# Altium PCB MB1710051255.PcbDoc (part 1 of 4)
Units mm, origin at the board's own origin, x right, y up, seen from the top; angles counter-clockwise.
Board outline 209.55 x 153.67 mm, 2 copper layers (Top Layer, Bottom Layer); 288 components, 212 nets, 1030 pads, 414 vias.
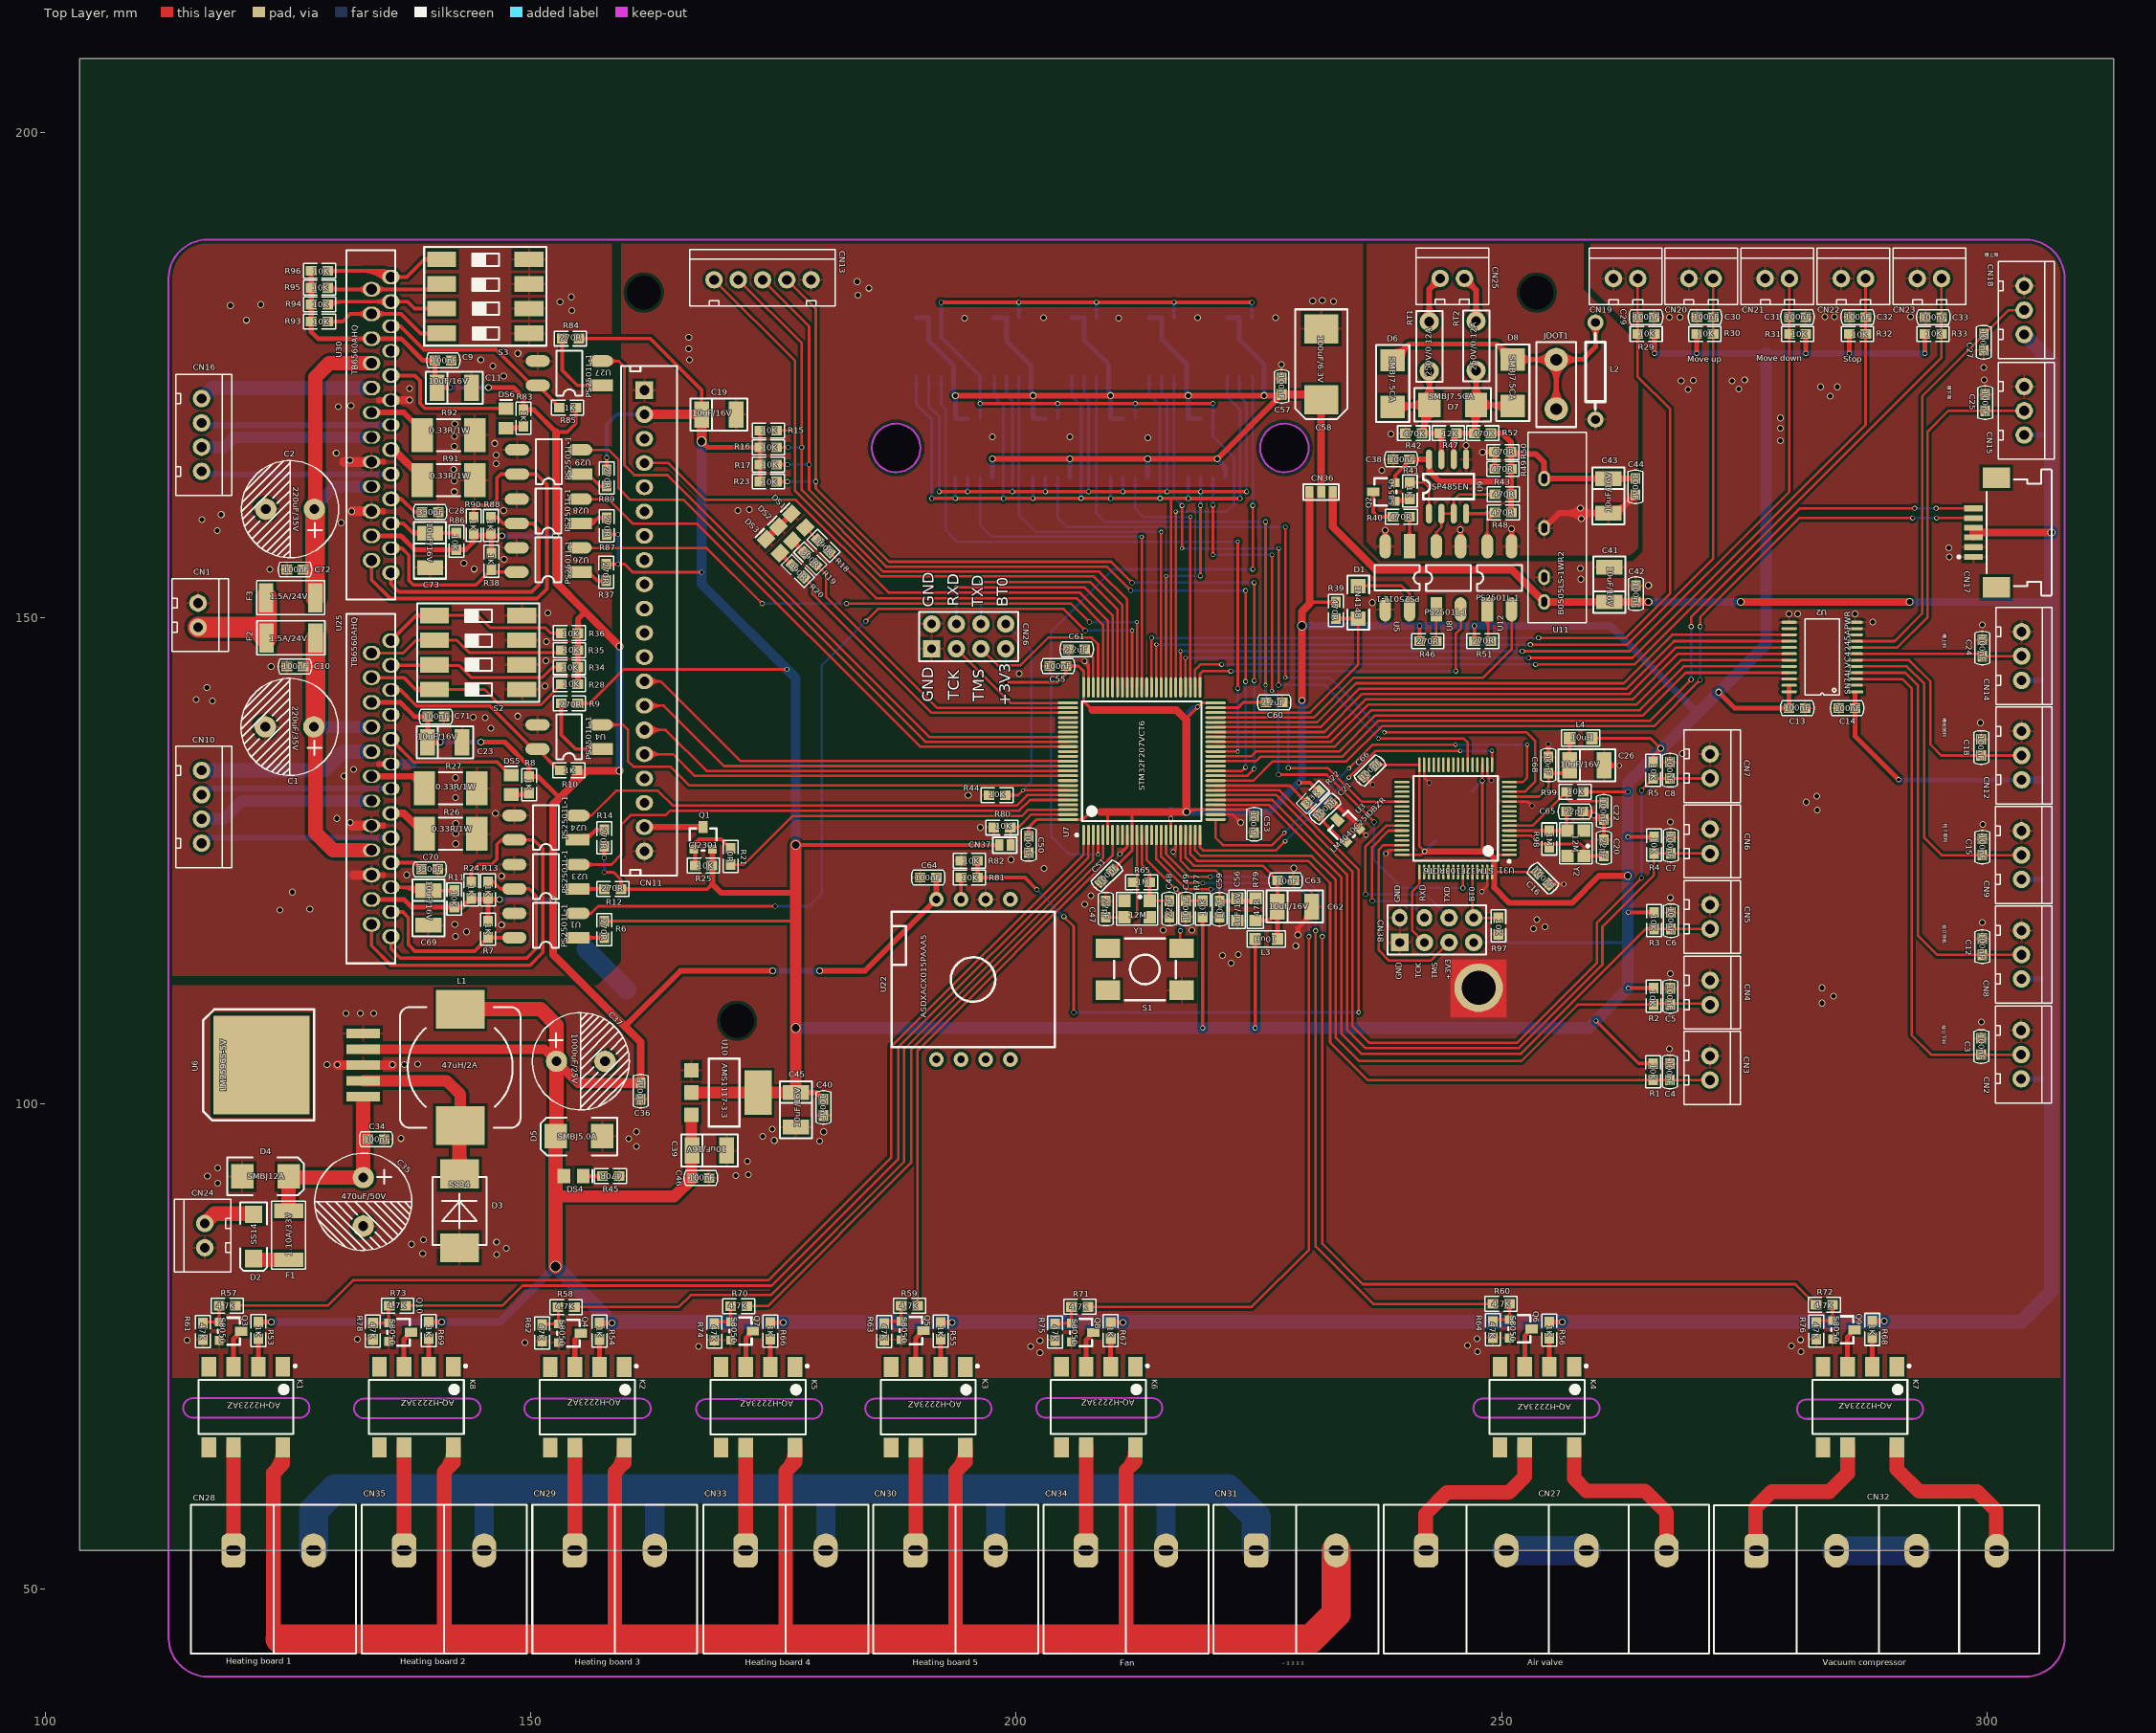
[diagram p0: Top Layer view]
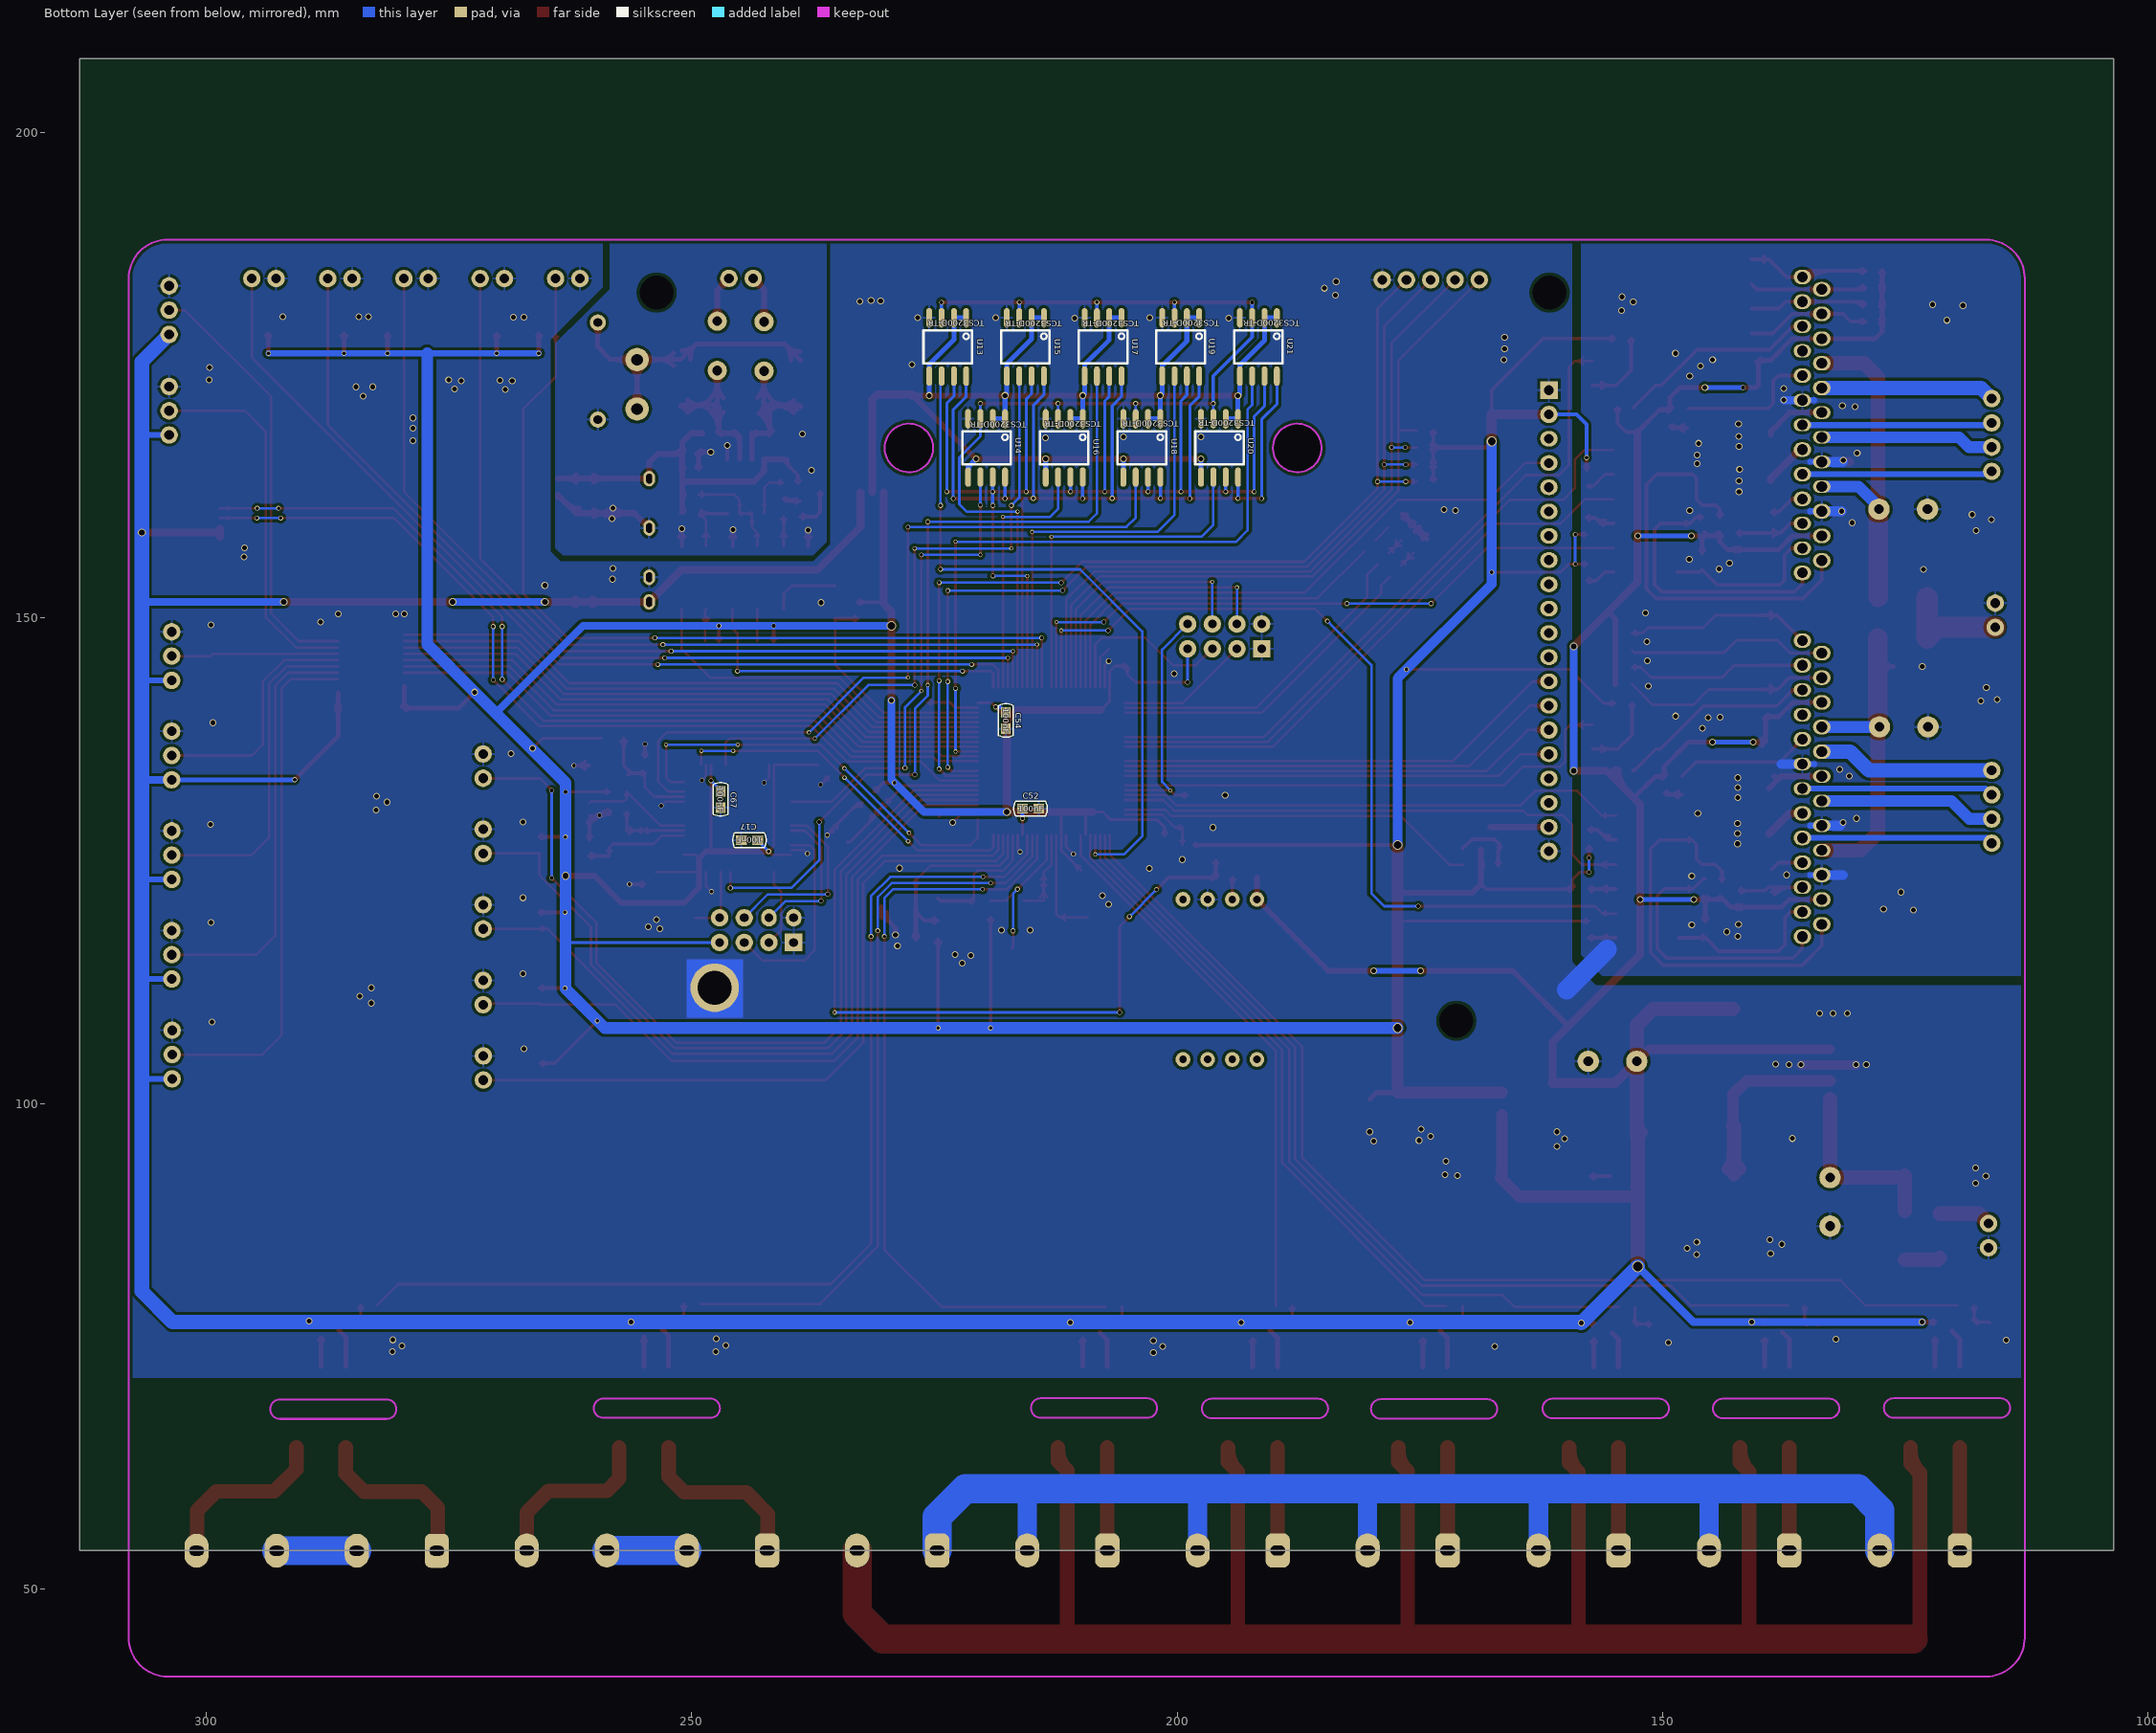
[diagram p1: Bottom Layer view, seen from below]

## Layer stack, top to bottom
Top Solder: solder mask 0.0102, Solder Resist, Dk 3.5
Top Layer: signal copper 0.0356
Dielectric1: dielectric 0.32, FR-4, Dk 4.8
Bottom Layer: signal copper 0.0356
Bottom Solder: solder mask 0.0102, Solder Resist, Dk 3.5

## Board outline
103.505,207.645 313.055,207.645 313.055,206.629 313.055,54.229 313.055,53.975 103.505,53.975 103.505,207.645

## Design rules (kind name [scope] priority, off if disabled: settings)
Clearance [All] p1: gap=0.3 ignorepadtopadclearanceinfootprint=FALSE except(0: Arc-Hole Track-Hole SMDPad-Hole THPad-Hole Via-Hole Fill-Hole Poly-Hole Region-Hole Text-Hole)
PolygonConnect [isvia] p1: connectstyle=Direct reliefconductorwidth=0.254 reliefentries=4 polygonreliefangle="90 Angle" airgapwidth=0.254
PolygonConnect PolygonConnect_1 [haspad ('c1-2')] p2: connectstyle=Relief reliefconductorwidth=0.3 reliefentries=4 polygonreliefangle="90 Angle" airgapwidth=0.254
PolygonConnect PolygonConnect_2 [All] p3: connectstyle=Relief reliefconductorwidth=0.254 reliefentries=4 polygonreliefangle="90 Angle" airgapwidth=0.254
RoomDefinition U_Step [InComponentClass('U_Step')] p1: confinementstyle=ConfineIn formatcopy=TRUE lockcomponents=FALSE outline 0,0 50.8,0 50.8,25.4 0,25.4
RoomDefinition U_Main [InComponentClass('U_Main')] p2: confinementstyle=ConfineIn formatcopy=TRUE lockcomponents=FALSE outline 0,0 50.8,0 50.8,25.4 0,25.4
RoutingVias [All] p1: holewidth=0.711 width=1.27 viastyle="Through Hole" minholewidth=0.711 minwidth=1.27 maxholewidth=0.711 maxwidth=1.27
SilkToSolderMaskClearance SilkscreenOverComponentPads [IsPad] p1: minsilkscreentomaskgap=0.254 clearancetoexposedcopper=TRUE
SolderMaskExpansion [All] p1: expansion=0.102
Width [All] p1: maxlimit=3 minlimit=0.254 preferedwidth=0.254 minimp=50.000000 maximp=50.000000 favimp=50.000000
29 further rules are at their usual default settings.

## Classes and differential pairs
component class U_Step: C1 C2 C9 C10 C11 C23 C28 C69 C70 C71 C72 C73 CN1 CN10 CN16 DS5 DS6 F2 F3 R6 R7 R8 R9 R10 R11 R12 R13 R14 R24 R26 R27 R28 R34 R35 R36 R37 R38 R83 R84 R85 R86 R87 R88 R89 R90 R91 R92 R93 R94 R95 R96 S2 S3 U1 U4 U23 U24 U25 U26 U27 U28 U29 U30
component class U_Main: C3 C4 C5 C6 C7 C8 C12 C13 C14 C15 C16 C17 C18 C19 C20 C21 C22 C24 C25 C26 C27 C29 C30 C31 C32 C33 C34 C35 C36 C37 C38 C39 C40 C41 C42 C43 C44 C45 C46 C47 C48 C49 C50 C51 C52 C53 C54 C55 C56 C57 C58 C59 C60 C61 C62 C63 C64 C65 C66 C67 C68 CN2 CN3 CN4 CN5 CN6 CN7 CN8 CN9 CN11 CN12 CN13 CN14 CN15 CN17 CN18 CN19 CN20 CN21 CN22 CN23 CN24 CN25 CN26 CN27 CN28 CN29 CN30 CN31 CN32 CN33 CN34 CN35 CN36 CN37 CN38 D1 D2 D3 D4 D5 D6 D7 D8 DS1 DS2 DS3 DS4 F1 JDOT1 K1 K2 K3 K4 K5 K6 K7 K8 L1 L2 L3 L4 Q1 Q2 Q3 Q4 Q5 Q6 Q7 Q8 Q9 Q10 R1 R2 R3 R4 R5 R15 R16 R17 R18 R19 R20 R21 R22 R23 R25 R29 R30 R31 R32 R33 R39 R40 R41 R42 R43 R44 R45 R46 R47 R48 R49 R50 R51 R52 R53 R54 R55 R56 R57 R58 R59 R60 R61 R62 R63 R64 R65 R66 R67 R68 R69 R70 R71 R72 R73 R74 R75 R76 R77 R78 R79 R80 R81 R82 R97 R98 R99 RT1 RT2 S1 U2 U3 U5 U6 U7 U8 U9 U10 U11 U12 U13 U14 U15 U16 U17 U18 U19 U20 U21 U22 U31 Y1 Y2

## Components (designator, comment, footprint, x,y, rotation, side; value= is the part's Value field where it differs from the comment)
C1 "220uF/35V" CAP-D10/L13 125.146,138.786 r180 top
C2 "220uF/35V" CAP-D10/L13 125.197,161.214 r180 top
C3 "100nF" C0603-3 299.39,105.867 r270 top
C4 "100nF" C0603-3 267.31,103.251 r90 top
C5 "100nF" C0603-3 267.36,111.023 r90 top
C6 "100nF" C0603-3 267.437,118.821 r90 top
C7 "100nF" C0603-3 267.411,126.594 r90 top
C8 "100nF" C0603-3 267.335,134.315 r90 top
C9 "100nF" C0603-3 140.97,176.53 r0 top
C10 "100nF" C0603-3 125.705,145.009 r180 top
C11 "10uF/16V" CE1210 142.164,173.812 r0 top
C12 "100nF" C0603-3 299.517,116.154 r270 top
C13 "100nF" C0603-3 280.441,140.716 r0 top
C14 "100nF" C0603-3 285.572,140.716 r0 top
C15 "100nF" C0603-3 299.517,126.416 r270 top
C16 "100nF" C0603-3 254.254,123.19 r135 top
C17 "100nF" C0603-3 244.043,127.127 r180 bottom
C18 "100nF" C0603-3 299.39,136.677 r270 top
C19 "10uF/16V" CE1210 169.418,171.044 r0 top
C20 "22pF" C0603-3 260.528,126.34 r90 top
C21 "100nF" C0603-3 231.789,130.352 r45 top
C22 "100nF" C0603-3 260.528,130.099 r270 top
C23 "10uF/16V" CE1210 141.199,137.287 r0 top
C24 "100nF" C0603-3 299.517,146.914 r270 top
C25 "100nF" C0603-3 299.796,172.187 r270 top
C26 "10uF/16V" CE1210 258.826,134.899 r0 top
C27 "100nF" C0603-3 299.644,178.41 r90 top
C28 "330pF" C0603-3 139.624,160.909 r0 top
C29 "100nF" C0603-3 264.871,181 r180 top
C30 "100nF" C0603-3 270.942,181 r0 top
C31 "100nF" C0603-3 280.467,181 r180 top
C32 "100nF" C0603-3 286.664,181 r0 top
C33 "100nF" C0603-3 294.462,181 r0 top
C34 "100nF" C0603-3 134.061,96.317 r180 top
C35 "470uF/50V" CAP-D10/L20 132.74,89.865 r270 top
C36 "100nF" C0603-3 161.315,101.27 r90 top
C37 "1000uF/25V" CAP-D10/L20 155.143,104.343 r0 top
C38 "100nF" C0603-3 239.649,166.345 r180 top
C39 "10uF/16V" CE1210 168.453,95.225 r0 top
C40 "100nF" C0603-3 180.137,99.593 r90 top
C41 "10uF/16V" CE1210 261.01,153.492 r90 top
C42 "100nF" C0603-3 263.83,152.502 r90 top
C43 "10uF/16V" CE1210 261.061,162.535 r270 top
C44 "100nF" C0603-3 263.779,163.525 r270 top
C45 "10uF/16V" CE1210 177.368,99.289 r270 top
C46 "100nF" C0603-3 167.513,92.329 r180 top
C47 "22pF" C0603-3 209.22,120.015 r90 top
C48 "22pF" C0603-3 215.773,120.04 r270 top
C49 "100nF" C0603-3 217.475,120.04 r270 top
C50 "100nF" C0603-3 201.27,126.67 r90 top
C51 "100nF" C0603-3 209.321,123.444 r45 top
C52 "100nF" C0603-3 215.087,130.378 r0 bottom
C53 "100nF" C0603-3 224.511,128.753 r90 top
C54 "100nF" C0603-3 217.627,139.446 r90 bottom
C55 "100nF" C0603-3 204.292,145.059 r0 top
C56 "1uF/16V" C0805-2-O 222.758,120.015 r270 top
C57 "100nF" C0603-3 227.33,173.863 r270 top
C58 "100uF/6.3V" CASE-D_7343 231.419,176.149 r270 top
C59 "10nF" C0603-3 220.929,120.015 r270 top
C60 "2.2uF" C0603-3 226.568,141.326 r180 top
C61 "2.2uF" C0603-3 206.223,146.787 r0 top
C62 "10uF/16V" CE1210 228.727,120.345 r0 top
C63 "10nF" C0603-3 227.736,122.961 r0 top
C64 "100nF" C0603-3 190.932,123.266 r180 top
C65 "22pF" C0603-3 257.531,130.073 r0 top
C66 "100nF" C0603-3 236.423,134.29 r45 top
C67 "100nF" C0603-3 247.015,131.318 r90 bottom
C68 "10nF" C0603-3 254.813,134.849 r90 top
C69 "10uF/16V" CE1210 139.522,120.091 r270 top
C70 "330pF" C0603-3 139.573,124.13 r0 top
C71 "100nF" C0603-3 140.208,139.852 r0 top
C72 "100nF" C0603-3 125.705,154.991 r180 top
C73 "10uF/16V" CE1210 139.7,156.921 r270 top
CN1 "" XHS2-2.5 115.722,150.292 r270 top
CN2 "检-下料" XHS3-2.5 300.838,110.033 r270 top
CN3 "" XHS2-2.5 271.45,103.657 r270 top
CN4 "" XHS2-2.5 271.475,111.43 r270 top
CN5 "" XHS2-2.5 271.475,119.228 r270 top
CN6 "" XHS2-2.5 271.475,127 r270 top
CN7 "" XHS2-2.5 271.475,134.747 r270 top
CN8 "检-待机" XHS3-2.5 300.863,120.32 r270 top
CN9 "检-取料" XHS3-2.5 300.863,130.581 r270 top
CN10 "" XHS4-2.5 113.411,136.804 r270 top
CN11 "" XH20-2.5 159.309,175.971 r270 top
CN12 "槽检测料" XHS3-2.5 300.888,140.843 r270 top
CN13 "" XHS5-2.5 166.37,182.169 r0 top
CN14 "槽上料" XHS3-2.5 300.888,151.079 r270 top
CN15 "槽下限" XHS3-2.5 301.142,176.352 r270 top
CN16 "" XHS4-2.5 113.411,175.108 r270 top
CN17 "" FFC/SM1.0-2H6 299.771,158.801 r90 top
CN18 "槽上限" XHS3-2.5 301.142,186.715 r270 top
CN19 "" XHS2-2.5 262.763,184.963 r0 top
CN20 "Move up" XHS2-2.5 270.535,184.963 r0 top
CN21 "Move down" XHS2-2.5 278.384,184.963 r0 top
CN22 "Stop" XHS2-2.5 286.233,184.963 r0 top
CN23 "" XHS2-2.5 294.056,184.963 r0 top
CN24 "" XHS2-2.5 116.408,86.385 r90 top
CN25 "" XHS2-2.5 244.907,184.988 r0 top
CN26 "" HDR2X4_CEN#1 195.148,148.184 r0 top
CN27 "Air valve" SIP4-8.25 246.355,53.953 r0 top
CN28 "Heating board 1" SIP2-8.25 123.495,53.953 r0 top
CN29 "Heating board 3" SIP2-8.25 158.648,53.953 r0 top
CN30 "Heating board 5" SIP2-8.25 193.751,53.953 r0 top
CN31 "～220V" SIP2-8.25 228.829,53.953 r0 top
CN32 "Vacuum compressor" SIP4-8.25 280.365,53.927 r0 top
CN33 "Heating board 4" SIP2-8.25 176.251,53.953 r0 top
CN34 "Fan" SIP2-8.25 211.303,53.953 r0 top
CN35 "Heating board 2" SIP2-8.25 141.072,53.953 r0 top
CN36 "" SMD3-1.2 230.2,162.966 r0 top
CN37 "" SMD2-1.2 198.831,126.619 r0 top
CN38 "" HDR2X4_CEN#2 243.357,117.932 r0 top
D1 "1N4148" Mini-MELF-O 235.204,151.663 r90 top
D2 "SS14" SMA 121.437,86.284 r270 top
D3 "SS34" SMC 142.646,88.976 r90 top
D4 "SMBJ12A" SMB 122.53,92.532 r0 top
D5 "SMBJ5.0A" SMB 155.092,96.571 r180 top
D6 "SMBJ7.5CA" SMB-2 238.709,174.015 r90 top
D7 "SMBJ7.5CA" SMB-2 245.11,171.907 r180 top
D8 "SMBJ7.5CA" SMB-2 251.079,174.092 r90 top
DS1 "" LED-0805 177.554,160.033 r135 top
DS2 "" LED-0805 176.206,158.686 r135 top
DS3 "" LED-0805 174.931,157.41 r135 top
DS4 "" LED-0805 154.407,92.507 r0 top
DS5 "" LED-0805 147.98,132.817 r90 top
DS6 "" LED-0805 147.447,170.561 r90 top
F1 "1.10A/33V" 1812 125.07,86.538 r90 top
F2 "1.5A/24V" 1812 125.171,147.98 r180 top
F3 "1.5A/24V" 1812 125.146,152.121 r180 top
JDOT1 "" PIN2-W4/L8.8 255.575,174.142 r90 top
K1 "AQ-H2223AZ" "SOP8 -2.54" 120.65,68.736 r180 top
K2 "AQ-H2223AZ" "SOP8 -2.54" 155.804,68.711 r180 top
K3 "AQ-H2223AZ" "SOP8 -2.54" 190.932,68.711 r180 top
K4 "AQ-H2223AZ" "SOP8 -2.54" 253.644,68.736 r180 top
K5 "AQ-H2223AZ" "SOP8 -2.54" 173.406,68.711 r180 top
K6 "AQ-H2223AZ" "SOP8 -2.54" 208.458,68.736 r180 top
K7 "AQ-H2223AZ" "SOP8 -2.54" 286.893,68.736 r180 top
K8 "AQ-H2223AZ" "SOP8 -2.54" 138.201,68.736 r180 top
L1 "47uH/2A" L-SMD-12 142.519,103.683 r90 top
L2 "" RH-10.0 259.664,175.362 r90 top
L3 "10uH" L0805 225.755,116.942 r0 top
L4 "10uH" L0805 258.14,137.617 r180 top
Q1 "CJ2301" SOT-23 167.767,127.229 r0 top
Q2 "S8550" SOT-23 237.998,163.017 r90 top
Q3 "S8050" SOT-23 118.923,76.508 r270 top
Q4 "S8050" SOT-23 153.899,76.305 r270 top
Q5 "S8050" SOT-23 189.179,76.584 r270 top
Q6 "S8050" SOT-23 251.841,76.762 r270 top
Q7 "S8050" SOT-23 171.628,76.533 r270 top
Q8 "S8050" SOT-23 206.705,76.381 r270 top
Q9 "S8050" SOT-23 285.115,76.66 r270 top
Q10 "S8050" SOT-23 136.398,76.406 r270 top
R1 "10K" R0603-3 265.582,103.302 r90 top
R2 "10K" R0603-3 265.633,111.074 r90 top
R3 "10K" R0603-3 265.684,118.872 r90 top
R4 "10K" R0603-3 265.684,126.644 r90 top
R5 "10K" R0603-3 265.608,134.366 r90 top
R6 "270R" R0603-3 157.556,117.958 r90 top
R7 "1K" R0603-3 145.593,117.907 r270 top
R8 "1K" R0603-3 149.809,132.867 r90 top
R9 "270R" R0603-3 154.026,141.199 r0 top
R10 "1K" R0603-3 153.949,134.315 r0 top
R11 "10K" R0603-3 142.113,121.031 r270 top
R12 "270R" R0603-3 158.471,122.072 r0 top
R13 "1K" R0603-3 145.593,122.022 r90 top
R14 "270R" R0603-3 157.556,127.305 r270 top
R15 "10K" R0603-3 174.422,169.316 r180 top
R16 "10K" R0603-3 174.422,167.564 r180 top
R17 "10K" R0603-3 174.422,165.811 r180 top
R18 "390R" R0603-3 180.176,157.41 r315 top
R19 "390R" R0603-3 178.793,156.099 r315 top
R20 "390R" R0603-3 177.536,154.806 r315 top
R21 "0R" R0603-3 170.561,125.4 r270 top
R22 "3.3K" R0603-3 230.519,131.52 r225 top
R23 "10K" R0603-3 174.422,164.059 r180 top
R24 "1K" R0603-3 143.866,121.945 r270 top
R25 "10K" R0603-3 167.818,124.511 r0 top
R26 "0.33R/1W" 2512 141.732,127.762 r180 top
R27 "0.33R/1W" 2512 141.732,132.461 r180 top
R28 "10K" R0603-3 153.949,143.18 r180 top
R29 "10K" R0603-3 264.922,179.248 r0 top
R30 "10K" R0603-3 270.891,179.248 r180 top
R31 "10K" R0603-3 280.518,179.248 r0 top
R32 "10K" R0603-3 286.614,179.248 r180 top
R33 "10K" R0603-3 294.411,179.273 r180 top
R34 "10K" R0603-3 153.949,144.932 r180 top
R35 "10K" R0603-3 153.949,146.685 r180 top
R36 "10K" R0603-3 153.949,148.438 r180 top
R37 "270R" R0603-3 157.764,154.741 r90 top
R38 "1K" R0603-3 145.923,155.804 r270 top
R39 "470R" R0603-3 232.918,150.825 r90 top
R40 "470R" R0603-3 239.7,160.452 r0 top
R41 "1K" R0603-3 240.538,163.068 r270 top
R42 "470K" R0603-3 240.97,169.037 r0 top
R43 "470R" R0603-3 250.114,162.738 r180 top
R44 "10K" R0603-3 198.069,131.75 r0 top
R45 "470R" R0603-3 158.191,92.507 r180 top
R46 "270R" R0603-3 242.367,147.625 r180 top
R47 "12K" R0603-3 244.526,169.037 r0 top
R48 "470R" R0603-3 250.114,160.884 r180 top
R49 "470R" R0603-3 250.088,165.354 r180 top
R50 "470R" R0603-3 250.063,167.107 r180 top
R51 "270R" R0603-3 248.006,147.625 r180 top
R52 "470K" R0603-3 248.082,169.037 r0 top
R53 "1K" R0603-3 121.92,76.584 r270 top
R54 "1K" R0603-3 157.074,76.508 r270 top
R55 "1K" R0603-3 192.202,76.533 r270 top
R56 "1K" R0603-3 254.914,76.61 r270 top
R57 "4.7K" R0603-3 118.694,79.175 r180 top
R58 "4.7K" R0603-3 153.594,79.023 r180 top
R59 "4.7K" R0603-3 188.951,79.15 r180 top
R60 "4.7K" R0603-3 249.987,79.353 r0 top
R61 "47K" R0603-3 116.23,76.483 r270 top
R62 "47K" R0603-3 151.155,76.33 r270 top
R63 "47K" R0603-3 186.411,76.457 r270 top
R64 "47K" R0603-3 249.098,76.66 r270 top
R65 "1M" R0603-3 212.852,122.784 r180 top
R66 "1K" R0603-3 174.676,76.533 r270 top
R67 "1K" R0603-3 209.728,76.559 r270 top
R68 "1K" R0603-3 288.163,76.686 r270 top
R69 "1K" R0603-3 139.471,76.584 r270 top
R70 "4.7K" R0603-3 171.374,79.124 r180 top
R71 "4.7K" R0603-3 206.502,79.048 r180 top
R72 "4.7K" R0603-3 283.261,79.251 r0 top
R73 "4.7K" R0603-3 136.22,79.175 r180 top
R74 "47K" R0603-3 168.885,76.432 r270 top
R75 "47K" R0603-3 203.987,76.406 r270 top
R76 "47K" R0603-3 282.397,76.533 r270 top
R77 "10K" R0603-3 219.202,120.066 r90 top
R78 "47K" R0603-3 133.731,76.508 r270 top
R79 "47R" R0805-3-O 224.638,119.99 r270 top
R80 "10K" R0603-3 198.577,128.422 r0 top
R81 "10K" R0603-3 195.123,123.266 r180 top
R82 "10K" R0603-3 195.199,124.993 r0 top
R83 "1K" R0603-3 149.225,170.637 r90 top
R84 "270R" R0603-3 154.127,178.791 r0 top
R85 "1K" R0603-3 153.822,171.679 r0 top
R86 "10K" R0603-3 142.316,157.861 r270 top
R87 "270R" R0603-3 157.81,159.436 r270 top
R88 "1K" R0603-3 145.872,159.563 r90 top
R89 "270R" R0603-3 157.81,164.465 r90 top
R90 "1K" R0603-3 144.094,159.487 r270 top
R91 "0.33R/1W" 2512 141.529,164.186 r180 top
R92 "0.33R/1W" 2512 141.529,168.859 r180 top
R93 "10K" R0603-3 128.27,180.543 r0 top
R94 "10K" R0603-3 128.27,182.296 r0 top
R95 "10K" R0603-3 128.27,184.023 r0 top
R96 "10K" R0603-3 128.27,185.75 r0 top
R97 "10K" R0603-3 249.657,118.313 r90 top
R98 "1M" R0603-3 254.889,127.279 r90 top
R99 "10K" R0603-3 257.505,132.105 r180 top
RT1 "250V/0.12A" FUSE-W2.8/L7.2 242.672,178.029 r90 top
RT2 "250V/0.12A" FUSE-W2.8/L7.2 247.498,178.079 r90 top
S1 "" SW_1102S 213.233,113.817 r180 top
S2 "" SDSW8-H 149.073,142.646 r90 top
S3 "" SDSW8-H 149.809,179.324 r90 top
U1 "PS2501L-1" SOP4-2.54 151.536,118.161 r180 top
U2 "SN74LVC4245APWR" TSSOP24-PW 286.41,142.418 r180 top
U3 "LM4040C25IDBZR" SOT-23 233.973,128.37 r45 top
U4 "PS2501L-1" SOP4-2.54 153.924,137.592 r180 top
U5 "PS2501L-1" SOP4-2.54 239.42,154.127 r270 top
U6 "LM2596S-5V" TO-263-5 122.403,104.115 r90 top
U7 "STM32F207VCT6" LQFP100_M 212.928,135.255 r90 top
U8 "PS2501L-1" SOP4-2.54 244.348,154.153 r90 top
U9 "SP485EN" SOP8 244.323,163.652 r90 top
U10 "AMS1117-3.3" SOT-223 169.85,101.117 r270 top
U11 "B0505LS-1WR2" B-LS 258.724,149.53 r90 top
U12 "PS2501L-1" SOP4-2.54 249.606,154.153 r90 top
U13 "TCS3200D-TR" SOIC8 223.621,177.923 r270 bottom
U14 "TCS3200D-TR" SOIC8 219.621,167.523 r270 bottom
U15 "TCS3200D-TR" SOIC8 215.621,177.923 r270 bottom
U16 "TCS3200D-TR" SOIC8 211.621,167.523 r270 bottom
U17 "TCS3200D-TR" SOIC8 207.621,177.923 r270 bottom
U18 "TCS3200D-TR" SOIC8 203.626,167.523 r270 bottom
U19 "TCS3200D-TR" SOIC8 199.626,177.923 r270 bottom
U20 "TCS3200D-TR" SOIC8 195.626,167.523 r270 bottom
U21 "TCS3200D-TR" SOIC8 191.626,177.923 r270 bottom
U22 "ASDXACX015PAAA5" "Legacy A2" 195.58,112.776 r90 top
U23 "PS2501L-1" SOP4-2.54 151.536,123.19 r180 top
U24 "PS2501L-1" SOP4-2.54 151.536,128.245 r180 top
U25 "TB6560AHQ" HZIP25-P-1.27 136.017,114.427 r90 top
U26 "PS2501L-1" SOP4-2.54 151.765,155.829 r180 top
U27 "PS2501L-1" SOP4-2.54 153.949,175.057 r180 top
U28 "PS2501L-1" SOP4-2.54 151.79,160.833 r180 top
U29 "PS2501L-1" SOP4-2.54 151.816,165.913 r180 top
U30 "TB6560AHQ" HZIP25-P-1.27 136.017,151.892 r90 top
U31 "STM32F103RCT6" LQFP64_L 245.262,129.388 r180 top
Y1 "12M" OSC3225 213.741,120.879 r180 top
Y2 "12M" OSC3225 258.47,125.501 r90 top

## Footprints (in the part's own frame and the unit in brackets; to place one, negate y for a bottom-side part, rotate by r counter-clockwise, add the part's x,y. Pads: shape width x height; smd on the part's side, far side on the other; paste and mask are expansions set on the pad)
1812 [mm]
  rect 1.5x3 smd: 1(-2.642,0.025) 2(2.413,0.025)
  silkscreen extent -3.61,-1.72 3.39,1.78
2512 [mm] "Chip Resistor, Body 6.4x3.2mm, IPC Low Density"
  rect 2.2x3.5 smd: 1(-2.7,0) 2(2.7,0)
  silkscreen extent -1.2,-1.65 1.2,1.65, body extent -3.3,-1.7 3.3,1.7, height 1.2
B-LS [mm]
  oval 1.6x1.2 hole 0.6 slot 1 at 0 deg: 1(2.13,4.35) 2(4.67,4.35) 4(9.75,4.35) 6(14.83,4.35)
  silkscreen extent 0,0 19.6,6
C0603-3 [mm]
  rect 1.1x1 smd: 1(-0.838,0) 2(0.838,0)
  silkscreen extent -1.71,-0.76 1.72,0.76
C0805-2-O [mil]
  rect 47x50 smd: 1(-44,0) 2(46,0)
  silkscreen extent -77,-33 79,33
CAP-D10/L13 [mm]
  round 2.2 hole 1: 1(-2.5,0) 2(2.5,0)
  silkscreen extent -5,-5 5,5
CAP-D10/L20 [mm]
  round 2.2 hole 1: 1(-2.5,0) 2(2.5,0)
  silkscreen extent -5,-5 5,5
CASE-D_7343 [mm]
  rect 3x3.5 smd: 1(3.65,0) 2(-3.65,0)
  silkscreen extent -5.65,-2.7 5.65,2.7
CE1210 [mil]
  rect 60x106.3 smd: 1(-72,-3) 2(68,-3)
  silkscreen extent -117,-68 113,62, body extent -67,-53 63,47, height 39
FFC/SM1.0-2H6 [mm] "FPC Connector, 6-Leads, Right Angle, Pitch 1.0 mm, Mated Height 3.0 mm, SMT"
  rect 0.6x1.9 smd: 1(-2.5,1.175) 2(-1.5,1.175) 3(-0.5,1.175) 4(0.5,1.175) 5(1.5,1.175) 6(2.5,1.175)
  rect 2.1x2.8 smd: MP1(-5.65,-1.175) MP2(5.65,-1.175)
  silkscreen extent -6.5,-6.87 6.5,2.8, body extent -6.5,-6.87 6.5,1.83, height 3.01
FUSE-W2.8/L7.2 [mil]
  round 78 hole 39.37: 1(-101.76,5.33) 2(98.25,5.33)
  silkscreen extent -145,-50 141,57
HDR2X4_CEN#1 [mm]
  rect 1.8x1.8 hole 0.9: 1(-3.861,-1.346)
  round 1.8 hole 0.9: 2(-1.321,-1.346) 3(1.219,-1.346) 4(3.759,-1.346) 5(-3.861,1.194) 6(-1.321,1.194) 7(1.219,1.194) 8(3.759,1.194)
  silkscreen extent -5.13,-2.62 5.03,2.46
HDR2X4_CEN#2 [mm]
  rect 1.8x1.8 hole 0.9: 1(-3.861,-1.346)
  round 1.8 hole 0.9: 2(-1.321,-1.346) 3(1.219,-1.346) 4(3.759,-1.346) 7(1.219,1.194) 8(3.759,1.194)
  oval 1.6x1.8 hole 0.9: 5(-3.861,1.194) 6(-1.321,1.194)
  silkscreen extent -5.13,-2.62 5.03,2.46
HZIP25-P-1.27 [mm]
  oval 1.5x1.8 hole 1.1: 1(2.76,0.425) 2(4.03,2.425) 4(6.57,2.425) 6(9.11,2.425) 7(10.38,0.425) 9(12.92,0.425) 11(15.46,0.425) 16(21.81,2.425) 17(23.08,0.425) 18(24.35,2.425) 20(26.89,2.425) 22(29.43,2.425) 23(30.7,0.425) 24(31.97,2.425) 25(33.24,0.425)
  oval 1.38x1.8 hole 1.1: 3(5.3,0.425) 5(7.84,0.425) 19(25.62,0.425) 21(28.16,0.425)
  oval 1.3x1.8 hole 1.1: 8(11.65,2.425) 10(14.19,2.425) 12(16.73,2.425) 13(18,0.425) 14(19.27,2.425) 15(20.54,0.425)
  silkscreen extent 0,0 36,5
L0805 [mil]
  rect 47x50 smd: 1(-45,0) 2(45,0)
  silkscreen extent -78,-33 78,33
L-SMD-12 [mm]
  rect 4x5 smd: 1(-5.975,-0.203) 2(6.025,-0.203)
  silkscreen extent -6.17,-6.4 6.23,6, body extent -6.17,-6.43 6.22,5.97, height 2.5
LED-0805 [mm]
  rect 1.3x1.5 smd: 1(-1,0) 2(1,0)
  silkscreen extent 1.91,-0.63 1.91,0.64
"Legacy A2" [mil]
  round 60 hole 30: 1(324.41,150) 2(324.41,50) 3(324.41,-50) 4(324.41,-150) 5(-324.41,150) 6(-324.41,50) 7(-324.41,-50) 8(-324.41,-150)
  silkscreen extent -275,-331 275,331, body extent -272,-331 280,335, height 669
LQFP64_L [mm]
  oval 1.55x0.25 smd: 1(-5.518,3.782) 2(-5.518,3.282) 3(-5.518,2.782) 4(-5.518,2.282) 5(-5.518,1.782) 6(-5.518,1.282) 7(-5.518,0.782) 8(-5.518,0.282) 9(-5.518,-0.218) 10(-5.518,-0.718) 11(-5.518,-1.218) 12(-5.518,-1.718) 13(-5.518,-2.218) 14(-5.518,-2.718) 15(-5.518,-3.218) 16(-5.518,-3.718) 33(5.532,-3.718) 34(5.532,-3.218) 35(5.532,-2.718) 36(5.532,-2.218) 37(5.532,-1.718) 38(5.532,-1.218) 39(5.532,-0.718) 40(5.532,-0.218) 41(5.532,0.282) 42(5.532,0.782) 43(5.532,1.282) 44(5.532,1.782) 45(5.532,2.282) 46(5.532,2.782) 47(5.532,3.282) 48(5.532,3.782)
  oval 0.25x1.55 smd: 17(-3.743,-5.493) 18(-3.243,-5.493) 19(-2.743,-5.493) 20(-2.243,-5.493) 21(-1.743,-5.493) 22(-1.243,-5.493) 23(-0.743,-5.493) 24(-0.243,-5.493) 25(0.257,-5.493) 26(0.757,-5.493) 27(1.257,-5.493) 28(1.757,-5.493) 29(2.257,-5.493) 30(2.757,-5.493) 31(3.257,-5.493) 32(3.757,-5.493) 49(3.757,5.557) 50(3.257,5.557) 51(2.757,5.557) 52(2.257,5.557) 53(1.757,5.557) 54(1.257,5.557) 55(0.757,5.557) 56(0.257,5.557) 57(-0.243,5.557) 58(-0.743,5.557) 59(-1.243,5.557) 60(-1.743,5.557) 61(-2.243,5.557) 62(-2.743,5.557) 63(-3.243,5.557) 64(-3.743,5.557)
  silkscreen extent -5.64,-4.32 4.36,4.58
LQFP100_M [mm] "Thin QFP, 100-Leads, Body 14x14mm, Pitch 0.5mm, IPC Low Density"
  oval 2.1x0.3 smd: 1(-7.6,6) 2(-7.6,5.5) 3(-7.6,5) 4(-7.6,4.5) 5(-7.6,4) 6(-7.6,3.5) 7(-7.6,3) 8(-7.6,2.5) 9(-7.6,2) 10(-7.6,1.5) 11(-7.6,1) 12(-7.6,0.5) 13(-7.6,0) 14(-7.6,-0.5) 15(-7.6,-1) 16(-7.6,-1.5) 17(-7.6,-2) 18(-7.6,-2.5) 19(-7.6,-3) 20(-7.6,-3.5) 21(-7.6,-4) 22(-7.6,-4.5) 23(-7.6,-5) 24(-7.6,-5.5) 25(-7.6,-6) 51(7.6,-6) 52(7.6,-5.5) 53(7.6,-5) 54(7.6,-4.5) 55(7.6,-4) 56(7.6,-3.5) 57(7.6,-3) 58(7.6,-2.5) 59(7.6,-2) 60(7.6,-1.5) 61(7.6,-1) 62(7.6,-0.5) 63(7.6,0) 64(7.6,0.5) 65(7.6,1) 66(7.6,1.5) 67(7.6,2) 68(7.6,2.5) 69(7.6,3) 70(7.6,3.5) 71(7.6,4) 72(7.6,4.5) 73(7.6,5) 74(7.6,5.5) 75(7.6,6)
  oval 0.3x2.1 smd: 26(-6,-7.6) 27(-5.5,-7.6) 28(-5,-7.6) 29(-4.5,-7.6) 30(-4,-7.6) 31(-3.5,-7.6) 32(-3,-7.6) 33(-2.5,-7.6) 34(-2,-7.6) 35(-1.5,-7.6) 36(-1,-7.6) 37(-0.5,-7.6) 38(0,-7.6) 39(0.5,-7.6) 40(1,-7.6) 41(1.5,-7.6) 42(2,-7.6) 43(2.5,-7.6) 44(3,-7.6) 45(3.5,-7.6) 46(4,-7.6) 47(4.5,-7.6) 48(5,-7.6) 49(5.5,-7.6) 50(6,-7.6) 76(6,7.6) 77(5.5,7.6) 78(5,7.6) 79(4.5,7.6) 80(4,7.6) 81(3.5,7.6) 82(3,7.6) 83(2.5,7.6) 84(2,7.6) 85(1.5,7.6) 86(1,7.6) 87(0.5,7.6) 88(0,7.6) 89(-0.5,7.6) 90(-1,7.6) 91(-1.5,7.6) 92(-2,7.6) 93(-2.5,7.6) 94(-3,7.6) 95(-3.5,7.6) 96(-4,7.6) 97(-4.5,7.6) 98(-5,7.6) 99(-5.5,7.6) 100(-6,7.6)
  silkscreen extent -7.72,-6.15 6.15,6.82, body extent -7,-7 7,7, height 1.6
Mini-MELF-O [mil]
  rect 60x60 smd: 1(-68,-1) 2(64,-1)
  silkscreen extent -112,-45 107,43
OSC3225 [mm]
  rect 1.3x1.3 smd: 1(0,0) 2(2.6,0) 3(2.6,1.7) 4(0,1.7)
  silkscreen extent -0.82,-0.82 3.42,2.52
PIN2-W4/L8.8 [mil]
  round 95 hole 47.24: 1(-102.76,-1.67) 2(97.24,-1.67)
  silkscreen extent -176,-83 169,78
R0603-3 [mm]
  rect 1.1x1 smd: 1(-0.889,0) 2(0.811,0)
  silkscreen extent -1.69,-0.76 1.61,0.76, body extent -1.18,-0.38 1.1,0.38, height 1
R0805-3-O [mil]
  rect 47x50 smd: 1(-45,0) 2(45,0)
  silkscreen extent -77,-33 77,33
RH-10.0 [mil]
  round 65 hole 35.43: 1(200,0) 2(-193.7,0)
  silkscreen extent -153,-39 157,40
SDSW8-H [mm]
  rect 1.6x3 smd: 1(0,0) 2(2.54,0) 3(5.08,0) 4(7.62,0) 5(7.62,9) 6(5.08,9) 7(2.54,9) 8(0,9)
  silkscreen extent -1.27,-1.8 8.89,10.8
SIP2-8.25 [mm]
  rrect50% 2.5x3.5 hole 1 slot 1.5 at 0 deg: 1(-4.125,0)
  oval 2.5x3.5 hole 1 slot 1.5 at 0 deg: 2(4.125,0)
  silkscreen extent -8.5,-10.6 8.5,4.7
SIP4-8.25 [mm]
  rrect50% 2.5x3.5 hole 1 slot 1.5 at 0 deg: 1(-4.125,0)
  oval 2.5x3.5 hole 1 slot 1.5 at 0 deg: 2(4.125,0) 3(12.375,0) 4(20.625,0)
  silkscreen extent -8.5,-10.6 25,4.7
SMA [mm]
  rect 1.8x1.8 smd: 1(-2.286,0) 2(2.261,0)
  silkscreen extent -3.52,-1.4 3.54,1.4
SMB [mm]
  rect 2.3x2.5 smd: 1(-2.261,-0.051) 2(2.54,-0.051)
  silkscreen extent -3.8,-1.98 4.1,1.92
SMB-2 [mm]
  rect 2.3x2.5 smd: 1(-2.261,-0.051) 2(2.54,-0.051)
  silkscreen extent -3.8,-1.78 4.1,1.65
SMC [mm]
  rect 3x4 smd: 1(-3.851,0) 2(3.749,0)
  silkscreen extent -3.55,-2.79 3.45,2.79, body extent -3.86,-2.79 3.89,2.79, height 1.05
SMD2-1.2 [mm]
  rect 0.84x1.2 smd: 1(-0.6,0) 2(0.6,0)
  silkscreen extent -1.23,-0.81 1.23,0.81
SMD3-1.2 [mm]
  rect 0.84x1.2 smd: 1(0,0) 2(1.2,0) 3(2.4,0)
  silkscreen extent -0.63,-0.81 3.03,0.81
SOIC8 [mm]
  oval 2x0.6 smd: 1(-3,1.905) 2(-3,0.635) 3(-3,-0.635) 4(-3,-1.905) 5(3,-1.905) 6(3,-0.635) 7(3,0.635) 8(3,1.905)
  silkscreen extent -1.7,-2.5 1.7,2.5
SOP4-2.54 [mm]
  rect 2.5x1.2 smd: 1(-3.263,1.088)
  oval 2.5x1.2 smd: 2(-3.263,-1.412) 3(3.237,-1.412) 4(3.237,1.088)
  silkscreen extent -1.35,-2.49 1.3,2.13
SOP8 [mil]
  oval 80x25 smd: 1(-114,71) 2(-114,21) 3(-114,-29) 4(-114,-79) 5(106,-79) 6(106,-29) 7(106,21) 8(106,71)
  silkscreen extent -55,-111 47,95
"SOP8 -2.54" [mm]
  rect 1.5x2.05 smd: 1(-3.81,-4.15) 2(-1.27,-4.15) 3(1.27,-4.15) 4(3.81,-4.15) 5(3.81,4.15) 6(1.27,4.15) 8(-3.81,4.15)
  silkscreen extent -5.19,-4.35 4.9,2.8, body extent -4.9,-3.2 4.9,3.2, height 3.6
SOT-23 [mil]
  rect 36x36 smd: 1(-38.5,-41) 2(36.5,-41)
  rect 36x50 smd: 3(-1,49)
  silkscreen extent -56,-46 54,44
SOT-223 [mil]
  rect 59.06x59.06 smd: 1(-90,-130) 2(0,-130) 3(90,-130)
  rect 180x110 smd: 2(0,140)
  silkscreen extent -138,-60 138,65
SW_1102S [mm]
  rect 2.5x2 smd: 1(-3.81,2.159) 2(-3.81,-2.159) 3(3.81,-2.159) 4(3.81,2.159)
  silkscreen extent -3.19,-3.16 3.16,3.19, body extent -3.19,-3.16 3.16,3.19, height 6
TO-263-5 [mil]
  rect 40x135 smd: 1(-134.33,-406) 2(-70.33,-406) 3(-6.33,-406) 4(57.67,-406) 5(121.67,-406)
  rect 400x388.74 smd: 6(-6,6)
  silkscreen extent -231,-207 219,243
TSSOP24-PW [mm]
  rect 1.6x0.3 smd: 1(0,0)
  oval 1.6x0.3 smd: 2(0,-0.65) 3(0,-1.3) 4(0,-1.95) 5(0,-2.6) 6(0,-3.25) 7(0,-3.9) 8(0,-4.55) 9(0,-5.2) 10(0,-5.85) 11(0,-6.5) 12(0,-7.15) 13(6.8,-7.15) 14(6.8,-6.5) 15(6.8,-5.85) 16(6.8,-5.2) 17(6.8,-4.55) 18(6.8,-3.9) 19(6.8,-3.25) 20(6.8,-2.6) 21(6.8,-1.95) 22(6.8,-1.3) 23(6.8,-0.65) 24(6.8,0)
  silkscreen extent 1.63,-7.48 5.17,0.33
XH20-2.5 [mm]
  rect 1.8x1.8 hole 1: 1(2.5,2.38)
  round 1.8 hole 1: 2(5,2.38) 15(37.5,2.38) 20(50,2.38)
  oval 1.6x1.8 hole 1: 3(7.5,2.38) 4(10,2.38) 5(12.5,2.38) 6(15,2.38) 7(17.5,2.38) 8(20,2.38) 9(22.5,2.38) 10(25,2.38) 11(27.5,2.38) 12(30,2.38) 13(32.5,2.38) 14(35,2.38) 16(40,2.38) 17(42.5,2.38) 18(45,2.38) 19(47.5,2.38)
  silkscreen extent 0,0 52.5,5.75
XHS2-2.5 [mm]
  round 1.8 hole 1: 1(-1.25,0) 2(1.25,0)
  silkscreen extent -3.75,-2.68 3.75,3.13
XHS3-2.5 [mm]
  round 1.8 hole 1: 1(2.5,2.675) 2(5,2.675) 3(7.5,2.675)
  silkscreen extent 0,0 10,5.8
XHS4-2.5 [mm]
  round 1.8 hole 1: 1(2.5,2.675) 2(5,2.675) 3(7.5,2.675) 4(10,2.675)
  silkscreen extent 0,0 12.5,5.8
XHS5-2.5 [mm]
  round 1.8 hole 1: 1(2.5,2.675) 2(5,2.675) 3(7.5,2.675) 4(10,2.675) 5(12.5,2.675)
  silkscreen extent 0,0 15,5.8

## Part data
C1 C2 C11 C19 C23 C26 C35 C37 C39 C41 C43 C45 C58 C62 C69 C73: library part "Cap Pol1", "Polarized Capacitor (Radial)"
C3 C4 C5 C6 C7 C8 C9 C10 C12 C13 C14 C15 C16 C17 C18 C20 C21 C22 C24 C25 C27 C28 C29 C30 C31 C32 C33 C34 C36 C38 C40 C42 C44 C46 C47 C48 C49 C50 C51 C52 C53 C54 C55 C56 C57 C59 C60 C61 C63 C64 C65 C66 C67 C68 C70 C71 C72: library part Cap, "Capacitor"
CN1 CN3 CN4 CN5 CN6 CN7 CN19 CN20 CN21 CN22 CN23 CN24 CN25 CN28 CN29 CN30 CN31 CN33 CN34 CN35 CN37 JDOT1: library part "Header 2", "Header, 2-Pin"
CN2 CN8 CN9 CN12 CN14 CN15 CN18 CN36: library part "Header 3", "Header, 3-Pin"
CN10 CN16 CN27 CN32: library part "Header 4", "Header, 4-Pin"
CN11: library part LCD, "12864"
CN13: library part "Header 5", "Header, 5-Pin"
CN17: library part "Header 6", "Header, 6-Pin"
CN26 CN38: library part "Header 4X2A", "Header, 4-Pin, Dual row"
D1 D2: library part Diode
D3: library part Diode, "Default Diode"
D4 D5: library part "D Schottky", "Schottky Diode"
D6 D7 D8: library part TVS
DS1 DS2 DS3 DS4 DS5 DS6: library part LED0, "Typical INFRARED GaAs LED"
F1 F2 F3: library part "Fuse 2"
K1 K2 K3 K4 K5 K6 K7 K8: library part AQ-H2223, "Solid state relay"
L1 L2: library part Inductor, "Inductor"
L3 L4: library part L
Q1: library part PMOS-1, "P-Channel MOSFET"
Q2: library part PNP
Q3 Q4 Q5 Q6 Q7 Q8 Q9 Q10: library part NPN
R1 R2 R3 R4 R5 R6 R7 R8 R9 R10 R11 R12 R13 R14 R15 R16 R17 R18 R19 R20 R21 R22 R23 R24 R25 R26 R27 R28 R29 R30 R31 R32 R33 R34 R35 R36 R37 R38 R39 R40 R41 R42 R43 R44 R45 R46 R47 R48 R49 R50 R51 R52 R53 R54 R55 R56 R57 R58 R59 R60 R61 R62 R63 R64 R65 R66 R67 R68 R69 R70 R71 R72 R73 R74 R75 R76 R77 R78 R79 R80 R81 R82 R83 R84 R85 R86 R87 R88 R89 R90 R91 R92 R93 R94 R95 R96 R97 R98 R99: library part Res3, "Resistor"
RT1 RT2: library part "Fuse 1", "Fuse"
S1: library part SW-PB, "Switch"
S2 S3: library part "SW DIP-4", "DIP Switch, 4 Position, SPST"
U1 U4 U5 U8 U12 U23 U24 U26 U27 U28 U29: library part PC187
U2: library part SN74LVC4245A, "OCTAL BUS TRANSCEIVER AND 3.3-V TO 5-V SHIFTER"
U3: library part LM4040xxx, "Precision Micropower Shunt Voltage Reference"
U7: "STM32 ARM-based 32-bit MCU Connectivity Line & Ethernet with 256 kB Flash, 128 kB Internal RAM, -40 to +85癈 Temperature, 100-Pin LQFP, Tray"
U9: library part MAX485
U10: library part AMS1117
U11: library part "A_S-1WR2 & B_LS-1WR2", "A_S-1WR2 & B_LS-1WR2 Series 1W, FIXED INPUT, ISOLATED & UNREGULATED"
U13 U14 U15 U16 U17 U18 U19 U20 U21: library part TCS3200, "Programmable Color Light-to-Frequency Converter"
U22: "ASDX 系列，15 psi 绝压，A2 ?"
U25 U30: "PWM Chopper-Type Bipolar Driver IC for Stepping Motor Control"
U31: "STM32 ARM-based 32-bit MCU with 256 Kbytes Flash, 64-pin LQFP, Industrial Temperature"
Y1 Y2: library part XTAL2, "Crystal Oscillator"

## Free pads (board coordinates)
  round 0 hole 3.5: 0(161.621,183.523)
  round 1.524 hole 3.5: 0(171.221,108.523) 0(253.621,183.523)
  round 1.524 hole 5: 0(187.621,167.523) 0(227.621,167.523)
  round 5 hole 3.5: 0(247.621,111.923)

## Via types
v1: diameter 0.7, hole 0.5, Top Layer to Bottom Layer, 231 vias
v2: diameter 0.5, hole 0.38, Top Layer to Bottom Layer, 67 vias
v3: diameter 0.5, hole 0.35, Top Layer to Bottom Layer, 64 vias
v4: diameter 0.42, hole 0.3, Top Layer to Bottom Layer, 27 vias
v5: diameter 0.45, hole 0.32, Top Layer to Bottom Layer, 8 vias
v6: diameter 0.8, hole 0.6, Top Layer to Bottom Layer, 8 vias
v7: diameter 1, hole 0.8, Top Layer to Bottom Layer, 4 vias
v8: diameter 0.45, hole 0.35, Top Layer to Bottom Layer, 3 vias
v9: diameter 1.2, hole 1, Top Layer to Bottom Layer, 1 vias
v10: diameter 0.6, hole 0.45, Top Layer to Bottom Layer, 1 vias

## Nets (pads, with @x,y where several pads share a name; then routed paths per layer and width w, separated by ;. In a path a pad name is that pad's centre, name@x,y a point inside that pad or via, vN(x,y) a via of type N, cw(c..) or ccw(c..) an arc to the next point about the centre after c; other vN are vias at no path point)
+3V3: C13.1 C16.2 C17.2 C19.1 C40.2 C45.1 C50.2 C51.2 C52.2 C53.2 C54.2 C55.2 C66.2 C67.2 CN11.2 CN26.4 CN36.1 CN37.1 CN38.4 L3.1 L4.1 Q1.2 R1.2 R2.2 R3.2 R4.2 R5.2 R6.2 R9.2 R12.2 R14.2 R15.2 R16.2 R17.2 R22.1 R23.2 R25.2 R29.2 R30.2 R31.2 R32.2 R33.2 R37.2 R39.2 R46.2 R51.2 R77.1 R84.2 R87.2 R89.2 R99.1 U2.23 U2.24 U7.6 U7.11 U7.19 U7.28 U7.50 U7.75 U7.100 U10.2 U31.1 U31.19 U31.32 U31.48 U31.64 | length 801.6
  Top Layer w0.254: C66.2@237.016,134.882 237.018,134.88 U31.32@241.506,134.88 241.506,126.515 v2(242.062,125.959) 241.709,125.605 U31.48@239.731,125.605 ; v2@242.062,125.836 ccw(c242.062,125.539) 241.852,125.749 ccw(c241.642,125.959) 241.939,125.959 ccw(c241.642,125.959) 241.852,126.169 ccw(c242.062,126.379) v2@242.062,126.082 ; v2@247.919,133.161 cw(c247.709,132.951) 248.006,132.951 cw(c248.303,132.951) v2@248.093,133.161 ; 248.006,125.959 v2(248.006,133.248) U31.19@248.006,134.88 ; U31.64@249.006,123.83 249.231,123.83 253.614,123.83 C16.2@253.661,123.783 ; 249.231,125.273 249.563,125.605 U31.1@250.781,125.605
  Top Layer w0.3: R9.2@154.837,141.199 156.032,141.199 159.555,144.721 v2(176.37,144.721) ; R9.2@155.134,140.951 cw(c155.732,140.354) 155.732,141.199 cw(c155.732,142.044) R9.2@155.134,141.446 ; R6.2@157.556,118.769 177.292,118.769 ; v2(157.556,123.825) 158.521,123.825 159.282,123.065 R12.2@159.282,122.072 ; R37.2@157.764,155.552 159.662,155.552 160.493,154.721 v2(167.589,154.721) ; R6.2@157.804,118.521 cw(c158.401,117.924) 158.401,118.769 cw(c158.401,119.614) R6.2@157.804,119.016 ; R87.2@157.81,158.625 v2(158.977,158.625) ; R37.2@158.011,155.305 cw(c158.609,154.707) 158.609,155.552 cw(c158.609,156.397) R37.2@158.011,155.799 ; R87.2@158.058,158.377 cw(c158.655,157.78) 158.655,158.625 cw(c158.655,159.47) R87.2@158.058,158.872 ; R12.2@159.034,122.32 ccw(c158.437,122.917) 159.282,122.917 ccw(c160.127,122.917) R12.2@159.529,122.32 ; v2(198.907,143.383) 204.292,143.383 205.13,144.221 ; C50.2@201.022,127.805 ccw(c200.425,128.403) 201.27,128.403 ccw(c202.115,128.403) C50.2@201.517,127.805 ; C50.2@201.27,127.508 201.27,128.422 202.102,129.255 U7.100@205.328,129.255 206.877,129.255 207.645,130.023 208.686,130.023 ; C55.2@204.884,144.81 cw(c204.302,144.221) 205.13,144.221 ; C55.2@205.376,144.81 ccw(c205.959,144.221) 205.13,144.221 ; C55.2@205.428,144.812 cw(c206.025,144.214) 206.025,145.059 cw(c206.025,145.904) C55.2@205.428,145.307 ; 207.848,140.513 206.928,141.433 U7.75@206.928,142.855 206.928,144.532 206.4,145.059 C55.2@205.13,145.059 205.13,144.221 ; U7.6@209.428,127.655 209.428,130.002 209.448,130.023 ; C51.2@209.914,124.037 211.928,126.051 U7.11@211.928,127.655 211.928,130.013 211.938,130.023 ; C51.2@209.949,124.422 ccw(c209.949,125.267) 210.547,124.67 ccw(c211.144,124.072) C51.2@210.299,124.072 ; 215.925,130.023 215.928,130.02 U7.19@215.928,127.655 ; v6@217.49,130.058 cw(c217.966,129.582) 217.966,130.255 ; v6(217.526,130.023) 217.758,130.255 U7.28@220.528,130.255 223.846,130.255 C53.2@224.511,129.591 ; 217.526,139.471 217.526,139.675 v2(218.694,140.843) 219.106,141.255 U7.50@220.528,141.255 ; v6@217.702,129.846 cw(c218.69,128.858) 218.69,130.255 ; R99.1@258.394,132.105 v2(262.992,132.105) ; R99.1@258.692,131.858 cw(c259.289,131.26) 259.289,132.105 cw(c259.289,132.95) R99.1@258.692,132.353 ; L4.1@259.283,137.617 265.328,137.617 v1(266.37,136.576) ; v1@266.17,136.576 ccw(c265.687,136.576) 266.028,136.917 ccw(c266.37,137.259) v1@266.37,136.776
  Top Layer w0.35: R77.1@218.972,118.897 cw(c218.417,118.342) 219.202,118.342 cw(c219.987,118.342) R77.1@219.432,118.897 ; v3(219.202,107.772) R77.1@219.202,119.177 ; v3(259.715,108.509) 264.111,104.113 R1.2@265.582,104.113 ; R1.2@265.353,103.883 ccw(c264.798,103.328) 264.798,104.113 ccw(c264.798,104.897) R1.2@265.353,104.343 ; R5.2@265.435,135.503 ccw(c265.241,135.814) 265.608,135.814 ; R5.2@265.608,135.177 265.608,135.814 ; R5.2@265.78,135.503 cw(c265.975,135.814) 265.608,135.814 ; v1@266.195,136.576 cw(c265.772,136.576) 266.071,136.277 cw(c266.37,135.978) v1@266.37,136.401 ; v1(266.37,136.576) 265.608,135.814
  Top Layer w0.38: R84.2@154.938,178.791 162.306,178.791 167.589,173.507 C19.1@167.589,170.967 ; R84.2@155.207,178.571 cw(c155.737,178.042) 155.737,178.791 cw(c155.737,179.539) R84.2@155.207,179.01 ; R14.2@157.337,126.225 cw(c156.808,125.695) 157.556,125.695 cw(c158.305,125.695) R14.2@157.775,126.225 ; v2(157.556,125.298) R14.2@157.556,126.494 ; R89.2@157.591,165.545 ccw(c157.062,166.074) 157.81,166.074 ccw(c158.559,166.074) R89.2@158.029,165.545 ; R89.2@157.81,165.276 v2(157.81,166.522) ; R12.2@159.282,122.072 168.148,122.072 168.694,122.618 ; R12.2@159.551,121.853 cw(c160.08,121.324) 160.08,122.072 cw(c160.08,122.821) R12.2@159.551,122.292 ; R23.2@173.392,164.278 ccw(c172.862,164.807) 173.611,164.807 ccw(c174.359,164.807) R23.2@173.83,164.278 ; R17.2@173.392,165.592 cw(c172.862,165.063) 173.611,165.063 cw(c174.359,165.063) R17.2@173.83,165.592 ; R17.2@173.392,166.03 ccw(c172.862,166.56) 173.611,166.56 ccw(c174.359,166.56) R17.2@173.83,166.03 ; R16.2@173.392,167.345 cw(c172.862,166.815) 173.611,166.815 cw(c174.359,166.815) R16.2@173.83,167.345 ; R16.2@173.392,167.783 ccw(c172.862,168.312) 173.611,168.312 ccw(c174.359,168.312) R16.2@173.83,167.783 ; R15.2@173.392,169.097 cw(c172.862,168.568) 173.611,168.568 cw(c174.359,168.568) R15.2@173.83,169.097 ; R23.2@173.611,164.059 R16.2@173.611,167.564 R15.2@173.611,169.316 ; v7(177.292,126.619) CN37.1@198.231,126.619 ; v7@177.511,126.4 cw(c178.04,125.871) 178.04,126.619 cw(c178.04,127.367) v7@177.511,126.838 ; CN37.1@198.069,126.456 ccw(c197.676,126.064) 197.676,126.619 ccw(c197.676,127.174) CN37.1@198.069,126.782 ; L3.1@224.324,116.616 cw(c223.63,115.921) 224.612,115.921 cw(c225.595,115.921) L3.1@224.9,116.616 ; v2(224.612,107.772) L3.1@224.612,116.942 ; v2(229.108,133.045) 230.251,133.045 R22.1@231.147,132.149 ; 230.2,151.46 230.376,151.636 R39.2@232.918,151.636 ; R22.1@230.837,132.149 ccw(c230.089,132.149) 230.618,132.678 ccw(c231.147,133.207) R22.1@231.147,132.459 ; R39.2@232.699,151.417 ccw(c232.17,150.888) 232.17,151.636 ccw(c232.17,152.385) R39.2@232.699,151.855 ; R46.2@241.337,147.844 ccw(c240.807,148.373) 241.556,148.373 ccw(c242.304,148.373) R46.2@241.775,147.844 ; v2(241.554,149.2) 241.556,149.198 R46.2@241.556,147.625 ; R51.2@246.975,147.844 ccw(c246.446,148.373) 247.195,148.373 ccw(c247.943,148.373) R51.2@247.414,147.844 ; v2(247.193,149.2) 247.195,149.198 R51.2@247.195,147.625 ; v3(262.992,127.457) 262.993,127.455 R4.2@265.684,127.455 ; v3(263.041,111.885) R2.2@265.633,111.885 ; v3(263.044,119.683) R3.2@265.684,119.683 ; R2.2@265.414,111.666 ccw(c264.885,111.137) 264.885,111.885 ccw(c264.885,112.634) R2.2@265.414,112.104 ; R3.2@265.465,119.464 ccw(c264.936,118.935) 264.936,119.683 ccw(c264.936,120.431) R3.2@265.465,119.902 ; R4.2@265.465,127.236 ccw(c264.936,126.707) 264.936,127.455 ccw(c264.936,128.204) R4.2@265.465,127.675
  Top Layer w0.5: v7@167.589,167.949 cw(c167.589,167.345) 168.016,167.772 cw(c168.443,168.199) v7@167.839,168.199 ; v7(167.589,168.199) 168.224,167.564 R16.2@173.611,167.564 ; R16.2@173.384,167.387 ccw(c172.957,166.96) 172.957,167.564 ccw(c172.957,168.167) R16.2@173.384,167.741 ; C45.1@177.292,101.117 179.451,101.117 C40.2@180.137,100.432 ; R29.2@265.556,179.071 cw(c265.129,178.644) 265.733,178.644 cw(c266.337,178.644) R29.2@265.91,179.071 ; R29.2@265.733,179.248 265.733,177.268 v2(265.735,177.267) ; R30.2@269.903,179.071 cw(c269.476,178.644) 270.08,178.644 cw(c270.684,178.644) R30.2@270.257,179.071 ; v2(270.08,177.268) R30.2@270.08,179.248 ; v1(272.339,142.367) 273.99,140.716 C13.1@279.603,140.716 U2.23@279.603,142.977 ; C13.1@279.376,140.539 ccw(c278.95,140.112) 278.95,140.716 ccw(c278.95,141.32) C13.1@279.376,140.893 ; C13.1@279.426,140.893 ccw(c279,141.32) 279.603,141.32 ccw(c280.207,141.32) C13.1@279.78,140.893 ; R31.2@281.152,179.071 cw(c280.725,178.644) 281.329,178.644 cw(c281.932,178.644) R31.2@281.505,179.071 ; R31.2@281.329,179.248 281.329,177.268 v2(281.33,177.267) ; R32.2@285.626,179.071 cw(c285.199,178.644) 285.803,178.644 cw(c286.406,178.644) R32.2@285.979,179.071 ; v2(285.803,177.268) R32.2@285.803,179.248 ; R33.2@293.424,179.096 cw(c292.997,178.67) 293.6,178.67 cw(c294.204,178.67) R33.2@293.777,179.096 ; v2(293.599,177.267) 293.6,177.268 R33.2@293.6,179.273
  Top Layer w0.6: R25.2@168.537,124.369 cw(c168.159,123.991) 168.694,123.991 ; R25.2@168.537,124.652 ccw(c168.159,125.031) 168.694,125.031 ; Q1.2@168.694,126.187 168.694,122.618 169.621,121.691 177.292,121.691 ; v2(242.062,125.959) 248.006,125.959 248.545,125.959 249.231,125.273 249.231,123.83 249.231,122.27 249.205,122.245 250.8,120.65 257.226,120.65 260.02,123.444 v6(262.992,123.444)
  Top Layer w0.8: 207.848,140.513 216.484,140.513 217.526,139.471 v6(217.526,130.023) 215.925,130.023 211.938,130.023 209.448,130.023 208.686,130.023 ; v1(229.413,141.503) v7(229.413,149.2) 229.413,150.673 230.2,151.46 CN36.1@230.2,162.966
  Top Layer w1: CN11.2@161.689,170.971 167.585,170.971 C19.1@167.589,170.967 v7(167.589,168.199)
  Top Layer w1.2: U10.2@166.548,101.117 U10.2@173.406,101.117 C45.1@177.292,101.117 177.292,118.769 v7(177.292,126.619)
  Bottom Layer w0.3: v2(157.556,123.825) v2(157.556,125.298) ; v2(158.977,155.551) v2(158.977,158.625) ; v2(198.907,143.383) CN26.4@198.907,146.837 ; v2(242.062,125.959) 243.205,127.102 C17.2@243.205,127.127 ; C67.2@247.015,132.156 247.015,132.258 v2(248.006,133.248) ; CN38.4@247.117,116.586 262.992,116.586
  Bottom Layer w0.38: v2(157.81,166.522) 157.81,169.951 158.83,170.971 CN11.2@161.689,170.971 ; C52.2@215.706,130.159 cw(c215.177,129.63) 215.925,129.63 cw(c216.674,129.63) C52.2@216.145,130.159 ; v2(215.925,129.362) C52.2@215.925,130.378 ; C54.2@217.627,140.284 218.186,140.843 v2(218.694,140.843)
  Bottom Layer w0.6: v2(265.735,177.267) 277.241,177.267 v2(281.33,177.267) v2(293.599,177.267)
  Bottom Layer w0.8: v6(217.526,130.023) 226.06,130.023 229.413,133.375 v1(229.413,141.503) ; v7(229.413,149.2) v2(241.554,149.2) v2(247.193,149.2) 261.188,149.2 270.18,140.208
  Bottom Layer w1: v7(167.589,168.199) v2(167.589,154.721) 167.589,153.492 177.292,143.789 v7(177.292,126.619)
  Bottom Layer w1.2: v7(177.292,107.772) v3(219.202,107.772) 258.953,107.772 262.992,111.811 v6(262.992,123.444) v3(262.992,127.457) 262.992,133.02 270.18,140.208 v1(272.339,142.367) 277.241,147.269 277.241,177.267